# EAGLE board attiny85 (EAGLE 9.6.2)
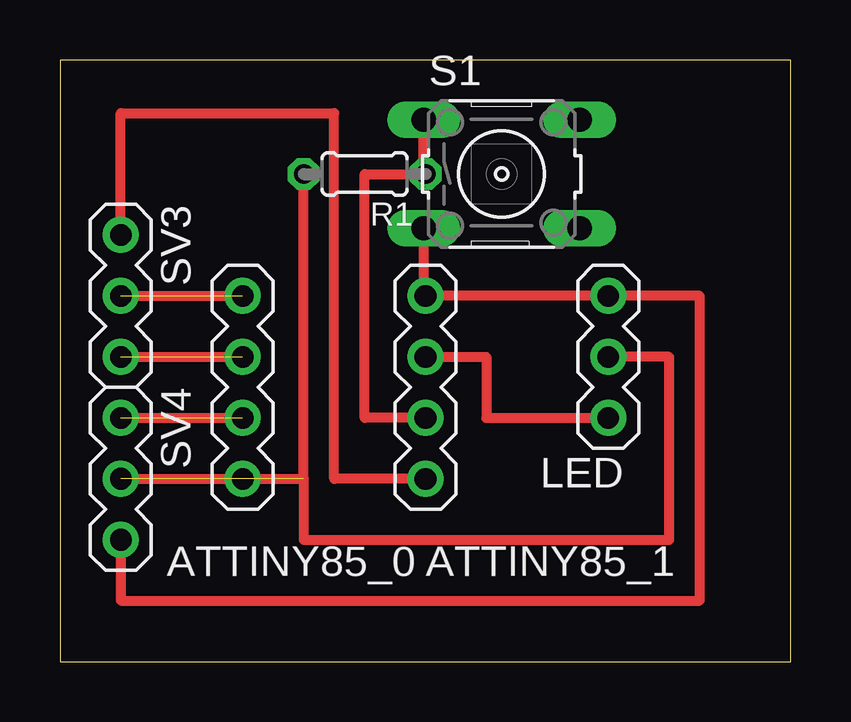
[diagram p0: board, top side]

Size 30.46 x 25.07 mm. Coordinates in mm from the lower left corner, seen from the top.
Outline: 0,0 30.46,0 30.46,25.07 0,25.07 0,0
Copper layers (1*16): Top 0.035mm / dielectric 1.5mm / Bottom 0.035mm
Design rules "default": minimum track width 6mil, minimum drill 0.35mm, track to track 6mil, track to pad 6mil, pad to pad 6mil, via to via 6mil, smd to smd 6mil, copper to edge 40mil, drill to drill 6mil, minimum pad ring 10mil, minimum via ring 8mil, stop-mask expansion 4mil, vias tented up to drill 0mil, thermal gap 10mil

## Footprints (pad centres in the part's own frame; a part is rotated, then mirrored left to right if it is on the bottom)
PINHEAD-MA04-1 = drill 0.9 pad 1.5: 1 -3.81,0; 2 -1.27,0; 3 1.27,0; 4 3.81,0
PINHEAD-MA03-1 = drill 0.9 pad 1.5: 1 -1.27,0; 2 1.27,0; 3 3.81,0
0204/5 = drill 0.813 octagon: 1 -2.54,0; 2 2.54,0
B3F-10XX = drill 1.016 long: 1 -3.251,2.261; 2 3.251,2.261; 3 -3.251,-2.261; 4 3.251,-2.261

## Placement (x,y rotation side)
ATTINY85_0  [PINHEAD-MA04-1]  7.62,11.43 270 top
ATTINY85_1  [PINHEAD-MA04-1]  15.24,11.43 270 top
LED  [PINHEAD-MA03-1]  22.86,13.97 270 top
R1  [0204/5]  12.7,20.32 180 top
S1  [B3F-10XX]  18.41,20.32 0 top
SV3  [PINHEAD-MA03-1]  2.54,16.51 270 top
SV4  [PINHEAD-MA03-1]  2.54,8.89 270 top

## Library data of the parts
ATTINY85_0 ATTINY85_1 LED SV3 SV4 = ytani1; OC_FARNELL: unknown; OC_NEWARK: unknown
R1 = rcl; SPICEPREFIX: R
S1 = switch-omron; MPN: B3F-1000; OC_FARNELL: 176432; OC_NEWARK: 36M3542

## Nets
BAT+: ATTINY85_0.4 LED.2 R1.2 SV4.2
GND: ATTINY85_1.1 LED.1 S1.3 SV4.3
N$1: ATTINY85_0.3 SV4.1
N$2: ATTINY85_1.4 SV3.1
N$3: ATTINY85_0.2 SV3.3
N$4: ATTINY85_0.1 SV3.2
PB3: ATTINY85_1.3 R1.1 S1.1
PB4: ATTINY85_1.2 LED.3

## Tracks (layer width: path | path; a pad name or v marks a point on that pad's centre or on a via)
BAT+  (1 unrouted)
  Top 0.406: SV4.2 ATTINY85_0.4 10.16,7.62 | 10.16,7.62 10.16,5.08 25.4,5.08 25.4,12.7 LED.2 | 10.16,7.62 R1.2
GND
  Top 0.406: SV4.3 2.54,2.54 26.67,2.54 26.67,15.24 LED.1 ATTINY85_1.1 15.16,15.32 S1.3
N$1  (1 unrouted)
  Top 0.406: SV4.1 ATTINY85_0.3
N$2
  Top 0.406: ATTINY85_1.4 11.43,7.62 11.43,22.86 2.54,22.86 SV3.1
N$3  (1 unrouted)
  Top 0.406: SV3.3 ATTINY85_0.2
N$4  (1 unrouted)
  Top 0.406: SV3.2 ATTINY85_0.1
PB3
  Top 0.406: ATTINY85_1.3 12.7,10.16 12.7,20.32 R1.1 15.16,20.4 S1.1
PB4
  Top 0.406: ATTINY85_1.2 17.78,12.7 17.78,10.16 LED.3